# Altium PCB cable_test.PcbDoc (part 2 of 2)
Units mm, origin at the board's own origin, x right, y up, seen from the top; angles counter-clockwise.
Board outline 86.36 x 42.42 mm, 4 copper layers (Top Layer, GND, VCC, Bottom Layer), stack 1.873 mm thick; 118 components, 85 nets, 386 pads, 247 vias.
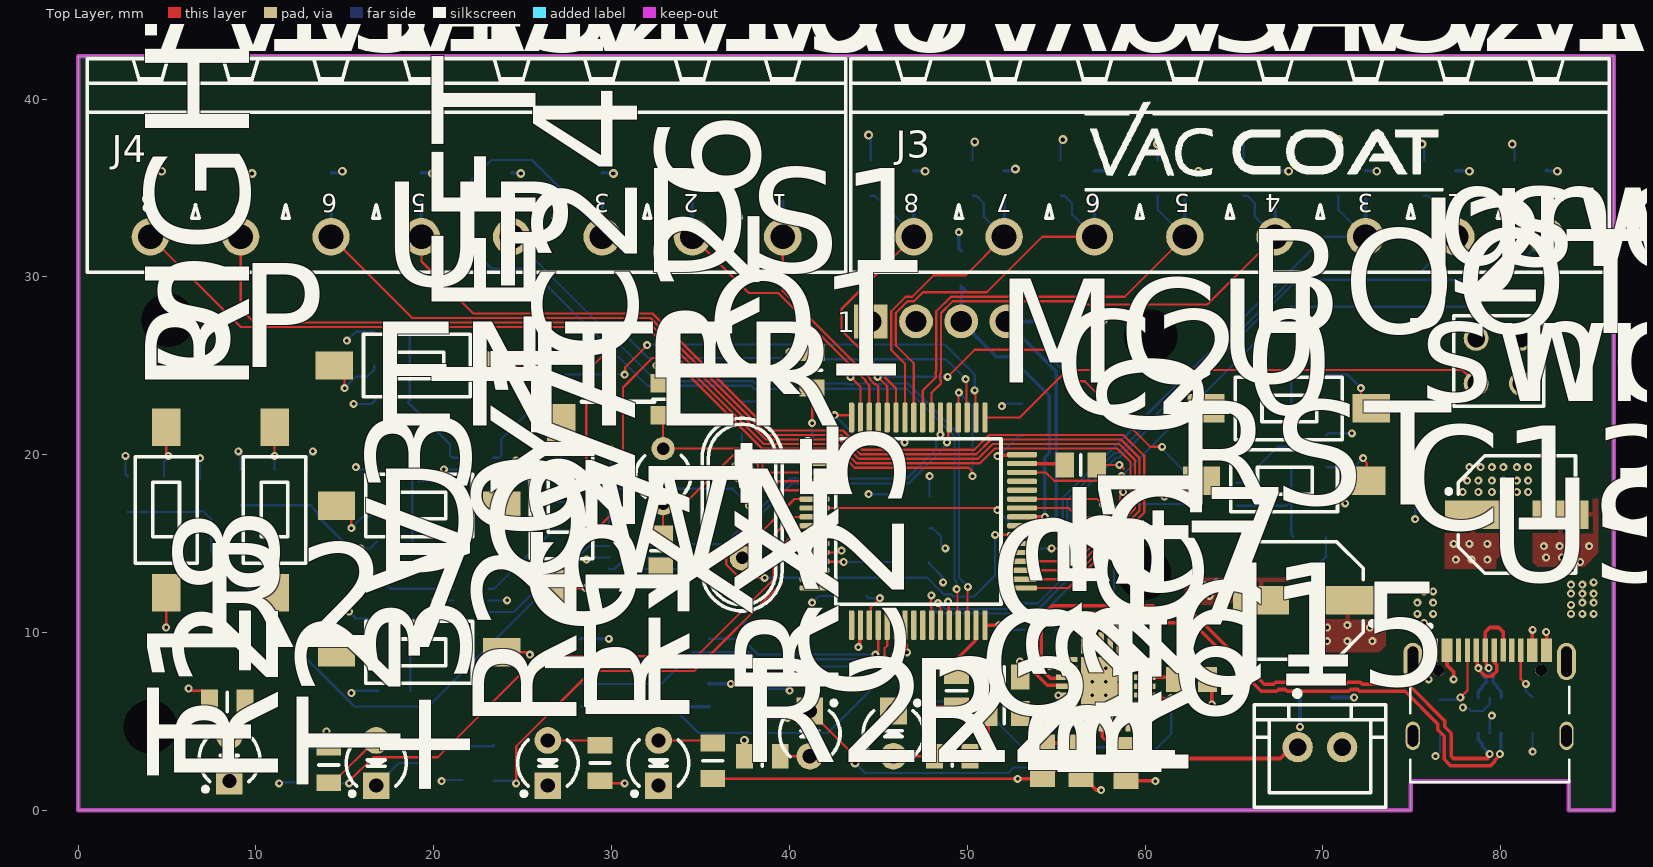
[diagram p0: Top Layer view]

## Via types
v1: diameter 0.45, hole 0.2, Top Layer to Bottom Layer, 218 vias
v2: diameter 0.5, hole 0.25, Top Layer to Bottom Layer, 29 vias

## Nets (pads, with @x,y where several pads share a name; then routed paths per layer and width w, separated by ;. In a path a pad name is that pad's centre, name@x,y a point inside that pad or via, vN(x,y) a via of type N, cw(c..) or ccw(c..) an arc to the next point about the centre after c; other vN are vias at no path point) (continued)
SPI1_SCK: (continued)
  Top Layer w0.127: v1(45.347,8.505) 45.347,9.116 45.494,9.263 MCU.21
  Bottom Layer w0.127: M1.6 32.788,7.112 34.185,8.509 34.387,8.509 34.462,8.583 34.462,8.786 34.573,8.898 37.741,8.898 38.129,8.509 44.497,8.509 44.659,8.347 45.102,8.347 45.26,8.505 v1(45.347,8.505)
SWCLK: J2.1 MCU.49 | length 29
  Top Layer w0.127: MCU.49 52.955,22.094 55.626,24.765 77.851,24.765 J2.1
SWDIO: J2.4 MCU.46 | length 33.1
  Top Layer w0.127: MCU.46 54.419,19.006 54.884,18.54 58.418,18.54 v1(58.674,18.796)
  Bottom Layer w0.127: v1(58.674,18.796) 68.199,28.321 78.975,28.321 80.753,26.543 J2.4
UART_RX: IC7.21 MCU.43 | length 12.8
  Top Layer w0.127: MCU.43 57.307,17.506 v1(57.623,17.19) ; v1(57.912,10.668) 57.912,10.581 58.035,10.458 IC7.21@58.035,9.239
  Bottom Layer w0.127: v1(57.623,17.19) 57.684,17.129 57.684,16.89 57.844,16.731 57.844,10.736 v1(57.912,10.668)
UART_TX: IC7.20 MCU.42 | length 13.7
  Top Layer w0.127: MCU.42 55.709,17.006 56.212,16.503 57.902,16.503 58.104,16.706 58.104,16.934 v1(58.166,16.996) ; IC7.20@58.535,9.239 58.541,9.245 58.541,10.408 v1(58.547,10.414)
  Bottom Layer w0.127: v1(58.166,16.996) 58.166,16.917 58.42,16.663 58.42,14.802 58.254,14.636 58.254,10.914 58.328,10.84 58.328,10.721 58.547,10.501 v1(58.547,10.414)
UP: IC2.4 MCU.50 | length 33.6
  Top Layer w0.127: v1(30.734,24.511) 30.769,24.546 30.769,24.927 v1(32.004,26.162) ; v1(50.419,23.622) 50.457,23.584 50.457,22.132 MCU.50
  Bottom Layer w0.127: IC2.4 23.652,19.827 23.789,19.964 23.789,20.868 27.432,24.511 v1(30.734,24.511) ; v1(32.004,26.162) 32.039,26.197 48.733,26.197 50.419,24.511 v1(50.419,23.622)
UPB: C5.2 IC2.3 R5.1 R10.2 | length 8.5
  Bottom Layer w0.127: R5.1 R10.2 18.653,23.039 18.553,22.939 20.915,20.577 20.915,19.964 21.052,19.827 IC2.3
USB_FS_N: IC5.3 IC7.4 | length 37.3
  Top Layer w0.2: IC7.4@55.735,7.039 54.494,7.039 53.758,7.775 53.758,10.47 54.808,11.52 60.42,11.52 60.989,10.951 62.84,10.951 66.697,7.094 67.23,7.094 67.338,7.202 68.044,7.202 68.152,7.094 71.294,7.094 71.402,7.202 72.108,7.202 72.216,7.094 74.79,7.094 76.854,5.03 76.854,4.699 77.216,4.337 77.216,3.038 77.333,2.921 79.258,2.921 79.258,2.99 79.375,3.107 v1(79.375,3.175)
  Bottom Layer w0.2: IC5.3 78.725,3.984 78.948,3.761 78.948,3.602 v1(79.375,3.175)
USB_FS_P: IC5.1 IC7.3 | length 36.5
  Top Layer w0.2: IC7.3@55.735,7.439 54.66,7.439 54.158,7.941 54.158,10.304 54.974,11.12 60.254,11.12 60.823,10.551 62.674,10.551 66.531,6.694 67.396,6.694 67.504,6.802 67.878,6.802 67.986,6.694 71.46,6.694 71.568,6.802 71.942,6.802 72.05,6.694 74.625,6.694 76.454,4.865 76.454,4.533 76.816,4.171 76.816,2.872 77.167,2.521 79.424,2.521 79.658,2.755 79.658,2.813 79.952,3.107 v1(79.952,3.175)
  Bottom Layer w0.2: v1(79.952,3.175) 79.989,3.211 79.989,4.297 IC5.1
pads on no net: IC7.1 IC7.10 IC7.11 IC7.12 IC7.15 IC7.17 IC7.18 IC7.19 IC7.22 IC7.23 IC7.24 MCU.2 MCU.10 MCU.11 MCU.14 MCU.15 MCU.16 MCU.17 MCU.24 MCU.25 MCU.37 MCU.38 MCU.44 MCU.45 USB. USB.A8 USB.B8

## Polygon pours and split planes (outlines as drawn)
GND on Bottom Layer "GND_L04_P005" (solid, pour order 5): 81.534,12.954 81.534,11.049 81.788,10.795 85.725,10.795 85.725,13.081
+5 on Bottom Layer "+5_L04_P000" (solid, pour order 0): 78.232,13.081 75.946,13.081 74.803,11.938 74.803,10.16 78.232,10.16
3V3 on Top Layer "3V3_L01_P009" (solid, pour order 9): 76.835,17.526 76.835,13.589 79.756,13.589 79.756,14.097 80.137,14.478 80.137,17.526
GND on Top Layer "GND_L01_P008" (solid, pour order 8): 81.788,17.526 81.788,13.97 82.042,13.716 84.709,13.716 85.471,14.478 85.471,17.526
GND on Top Layer "GND_L01_P007" (solid, pour order 7): 68.199,10.922 68.199,12.954 68.072,13.081 62.738,13.081 62.23,12.573 62.23,11.557 63.881,11.557 64.516,10.922
+5 on Top Layer "+5_L01_P006" (solid, pour order 6): 69.723,12.7 69.723,8.89 73.152,8.89 73.533,9.271 73.533,12.7
3V3 on VCC (split plane): 85.85,0.51 84.33,0.51 84.33,1.651 84.321,1.751 84.292,1.846 84.244,1.935 84.181,2.012 84.104,2.075 84.015,2.123 83.92,2.152 83.82,2.161 75.057,2.161 74.957,2.152 74.862,2.123 74.773,2.075 74.696,2.012 74.569,1.885 74.506,1.808 74.458,1.719 74.429,1.624 74.42,1.524 74.42,0.51 70.106,0.51 70.106,5.788 70.666,6.348 84.201,6.348 84.251,6.357 84.293,6.385 84.674,6.766 84.702,6.808 84.711,6.858 84.711,9.652 84.702,9.702 84.674,9.744 83.531,10.887 83.489,10.915 83.439,10.924 79.81,10.924 79.123,11.611 79.123,12.954 79.114,13.004 79.086,13.046 79.044,13.074 78.994,13.083 67.945,13.083 67.895,13.074 67.853,13.046 65.948,11.141 65.92,11.099 65.911,11.049 65.911,1.016 65.92,0.966 65.948,0.924 66.362,0.51 0.51,0.51 0.51,41.908 85.85,41.908
+5 on VCC (split plane): 78.865,11.557 78.874,11.507 78.902,11.465 79.664,10.703 79.706,10.675 79.756,10.666 83.385,10.666 84.453,9.598 84.453,6.912 84.147,6.606 70.612,6.606 70.562,6.597 70.52,6.569 69.885,5.934 69.857,5.892 69.848,5.842 69.848,0.51 66.729,0.51 66.169,1.07 66.169,10.995 67.999,12.825 78.865,12.825
GND on GND (split plane): 85.85,0.51 84.33,0.51 84.33,1.651 84.321,1.751 84.292,1.846 84.244,1.935 84.181,2.012 84.104,2.075 84.015,2.123 83.92,2.152 83.82,2.161 75.057,2.161 74.957,2.152 74.862,2.123 74.773,2.075 74.696,2.012 74.569,1.885 74.506,1.808 74.458,1.719 74.429,1.624 74.42,1.524 74.42,0.51 0.51,0.51 0.51,41.908 85.85,41.908

## Keep-outs
Keep-Out Layer:
  the board outline again, w0.254

## Other copper
VCC (plane layer: these items are gaps in the copper):
  lines w0.254: 67.056,0 66.04,1.016 66.04,11.049 67.945,12.954 78.994,12.954 78.994,11.557 79.756,10.795 83.439,10.795 84.582,9.652 84.582,6.858 84.201,6.477 70.612,6.477 69.977,5.842 69.977,-0.127

## Silkscreen, mask and mechanical layers (free items; w line width, h text height)
Top Overlay:
  drawing of 1094 lines, arcs and shapes, not listed
  text "A15" at 4.572,40.786 h10
  text "A13" at 14.478,40.786 h10
  text "A10" at 29.972,40.786 h10
  text "A9" at 35.052,40.786 h10
  text "A8" at 39.878,40.786 h10
  text "A6" at 52.451,40.786 h10
  text "A5" at 58.039,40.786 h10
  text "A3" at 68.072,40.786 h10
  text "A0" at 82.677,40.786 h10
  text "A14" at 9.652,40.767 h10
  text "A12" at 19.685,40.767 h10
  text "A11" at 25.019,40.767 h10
  text "A7" at 47.498,40.776 h10
  text "A4" at 62.738,40.767 h10
  text "A2" at 73.152,40.767 h10
  text "A1" at 77.978,40.767 h10
  text "swdio" at 80.01,28.721 h10
  text "gnd" at 76.454,28.701 h10
  text "swclk" at 75.438,21.101 h10
  text "nrst" at 80.781,21.101 h10

## Text inside footprints (layer, text, board x,y; h text height)
DS1: Top Overlay "1" at 42.687,26.894 h1.16; Mechanical 14 "1" at 42.687,26.894 h1.16
J3: Top Overlay "8" at 47.31,34.658 h1 r180; Top Overlay "5" at 62.51,34.658 h1 r180; Top Overlay "6" at 57.51,34.658 h1 r180; Top Overlay "7" at 52.51,34.658 h1 r180; Top Overlay "4" at 67.63,34.658 h1 r180; Top Overlay "1" at 82.83,34.658 h1 r180; Top Overlay "2" at 77.83,34.658 h1 r180; Top Overlay "3" at 72.83,34.658 h1 r180
J4: Top Overlay "3" at 29.904,34.658 h1 r180; Top Overlay "2" at 34.904,34.658 h1 r180; Top Overlay "1" at 39.904,34.658 h1 r180; Top Overlay "4" at 24.704,34.658 h1 r180; Top Overlay "7" at 9.584,34.658 h1 r180; Top Overlay "6" at 14.584,34.658 h1 r180; Top Overlay "5" at 19.584,34.658 h1 r180; Top Overlay "8" at 4.384,34.658 h1 r180